# Altium PCB base_board.PcbDoc
Units mm, origin at the board's own origin, x right, y up, seen from the top; angles counter-clockwise.
Board outline 152.4 x 101.6 mm, 2 copper layers (Top Layer, Bottom Layer); 4 components, 2 nets, 10 pads, 0 vias.
Unrouted connection lines stored in the file: 2.
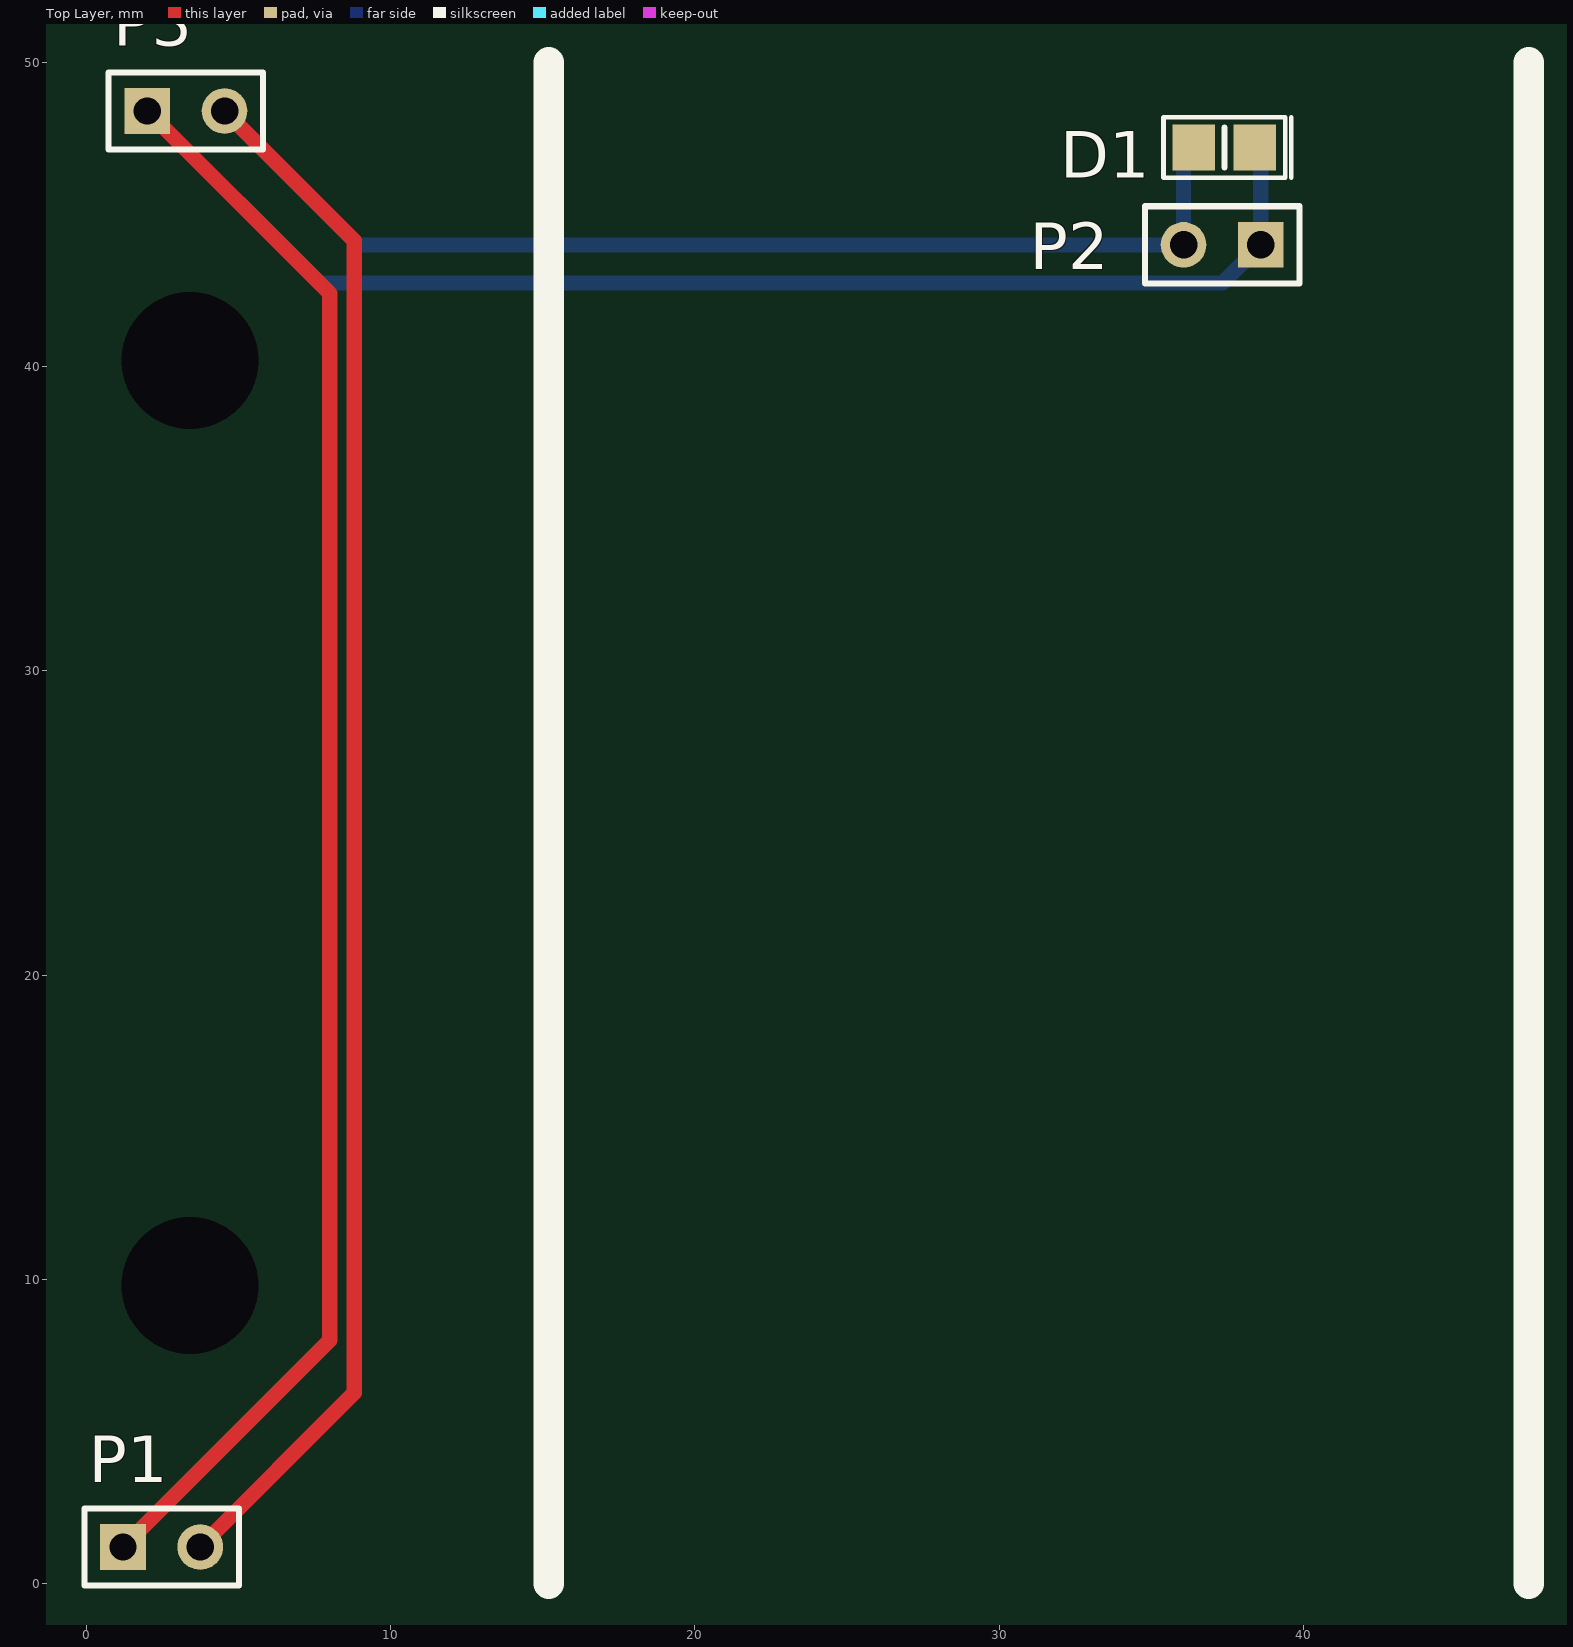
[diagram p0: Top Layer view]
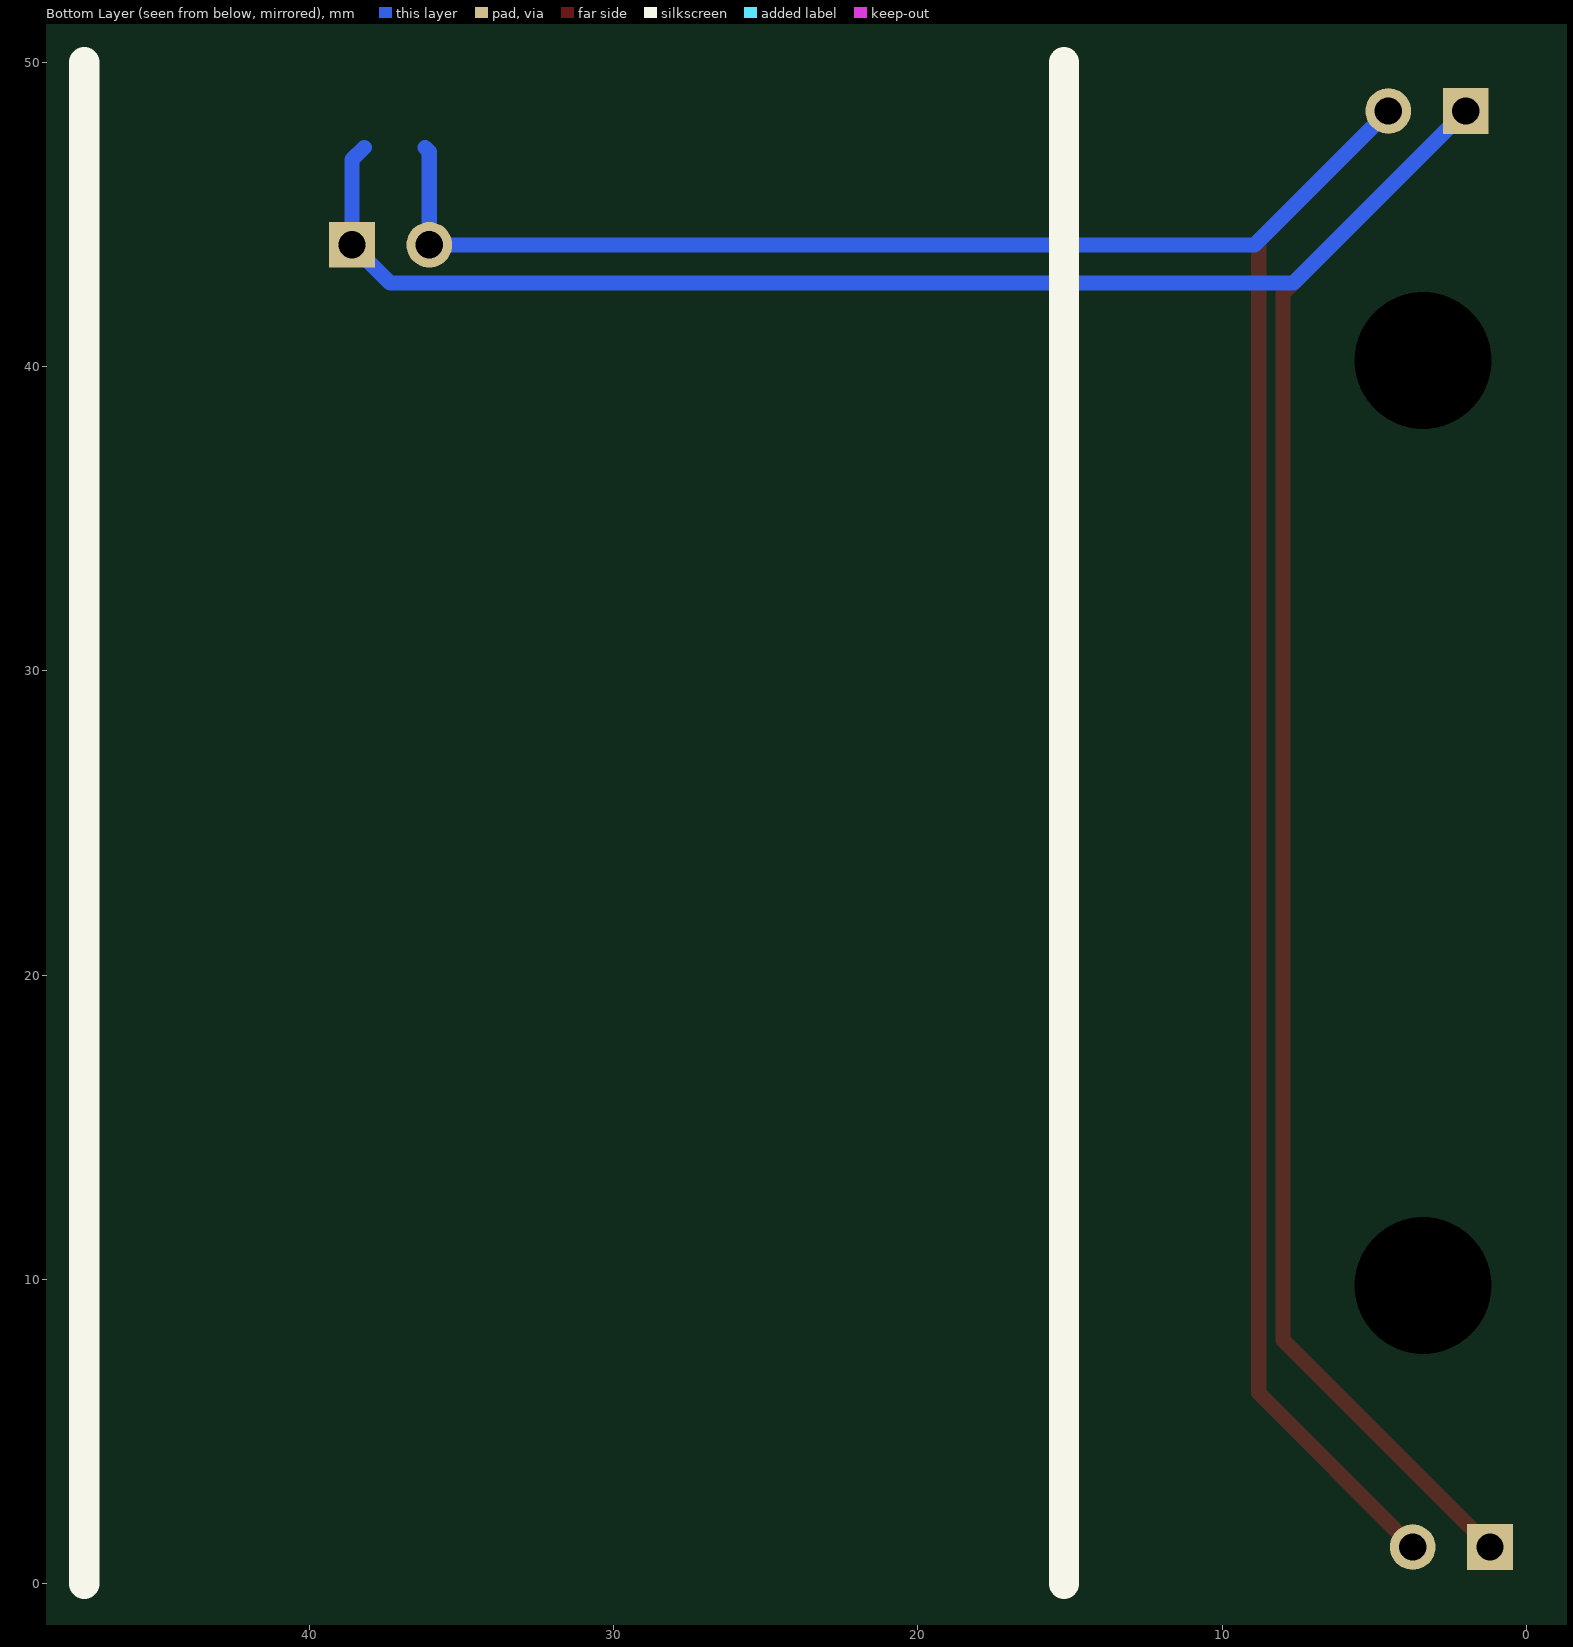
[diagram p1: Bottom Layer view, seen from below]

## Layer stack, top to bottom
Top Layer: signal copper 0.0356
Dielectric: dielectric 0.32, FR-4, Dk 4.8
Bottom Layer: signal copper 0.0356

## Board outline
-73.787,-35.179 78.613,-35.179 78.613,66.421 -73.787,66.421

## Design rules (kind name [scope] priority, off if disabled: settings)
Clearance [All] p1: gap=0.254
PolygonConnect [All] p1: connectstyle=Relief reliefconductorwidth=0.254 reliefentries=4 polygonreliefangle="90 Angle"
RoomDefinition base_board [InComponentClass('base_board')] p1: confinementstyle=ConfineIn formatcopy=TRUE lockcomponents=FALSE outline -99.187,-60.579 -48.387,-60.579 -48.387,-35.179 -99.187,-35.179
RoutingVias [All] p1: holewidth=0.711 width=1.27 viastyle="Through Hole" minholewidth=0.711 minwidth=1.27 maxholewidth=0.711 maxwidth=1.27
SilkscreenOverComponentPads [All] p1: minsilkscreentomaskgap=0.254
SolderMaskExpansion [All] p1: expansion=0.102
Width [All] p1: maxlimit=1 minlimit=0.2 preferedwidth=0.254
27 further rules are at their usual default settings.

## Components (designator, comment, footprint, x,y, rotation, side; value= is the part's Value field where it differs from the comment)
D1 "D Diode" 0805_M_POL 37.4,47.2 r0 top
P1 "Header 2" HDR1X2 1.2,1.2 r0 top
P2 "Header 2" HDR1X2 38.6,44 r180 top
P3 "Header 2" HDR1X2 2,48.4 r0 top

## Footprints (in the part's own frame and the unit in brackets; to place one, negate y for a bottom-side part, rotate by r counter-clockwise, add the part's x,y. Pads: shape width x height; smd on the part's side, far side on the other; paste and mask are expansions set on the pad)
0805_M_POL [mm] "Passive Component, Body 2.0x1.2mm, IPC Low Density, polarised"
  rect 1.4x1.5 smd: 1(-1,0) 2(1,0)
  silkscreen extent -2,-1 2.2,1, body extent -1.07,-0.7 1.07,0.7, height 0.7
HDR1X2 [mm] "Connector; Header; 2 Position"
  rect 1.5x1.5 hole 0.9: 1(0,0)
  round 1.5 hole 0.9: 2(2.54,0)
  silkscreen extent -1.27,-1.27 3.81,1.27

## Part data
P1 P2 P3: "Header, 2-Pin"

## Free pads (board coordinates)
  round 0 hole 4.5: 0(3.4,9.8) 0(3.4,40.2)

## Nets (pads, with @x,y where several pads share a name; then routed paths per layer and width w, separated by ;. In a path a pad name is that pad's centre, name@x,y a point inside that pad or via, vN(x,y) a via of type N, cw(c..) or ccw(c..) an arc to the next point about the centre after c; other vN are vias at no path point)
NetD1_1: D1.1 P1.2 P2.2 P3.2 | length 87.7
  Top Layer w0.5: P1.2 8.8,6.26 8.8,44.14 P3.2
  Bottom Layer w0.5: P3.2 8.94,44 P2.2 36.06,47.06 36.2,47.2
NetD1_2: D1.2 P1.1 P2.1 P3.1 | length 95.3
  Top Layer w0.5: P1.1 8,8 8,42.4 P3.1
  Bottom Layer w0.5: P3.1 7.654,42.746 37.346,42.746 P2.1 38.6,46.8 38.2,47.2

## Silkscreen, mask and mechanical layers (free items; w line width, h text height)
Top Overlay:
  lines w1: 15.2,0 15.2,50 ; 47.4,0 47.4,50
Bottom Overlay:
  lines w1: 15.2,0 15.2,50 ; 47.4,0 47.4,50
Mechanical 1:
  lines w0.3: 0,0 0,50 50,50 50,0 0,0
Mechanical 3:
  circle w0.3: c47.161,59.185 r9.215
  circle w0.3: c31.2,68.4 r9.215
  circle w0.3: c15.239,59.185 r9.215